# Altium PCB NEP.PCBDOC
Units mil, origin at the board's own origin, x right, y up, seen from the top; angles counter-clockwise.
Board outline 4000 x 3000 mil, 4 copper layers (Top Layer, Internal Plane 1, Internal Plane 2, Bottom Layer); 70 components, 126 nets, 630 pads, 225 vias.
Unrouted connection lines stored in the file: 2.
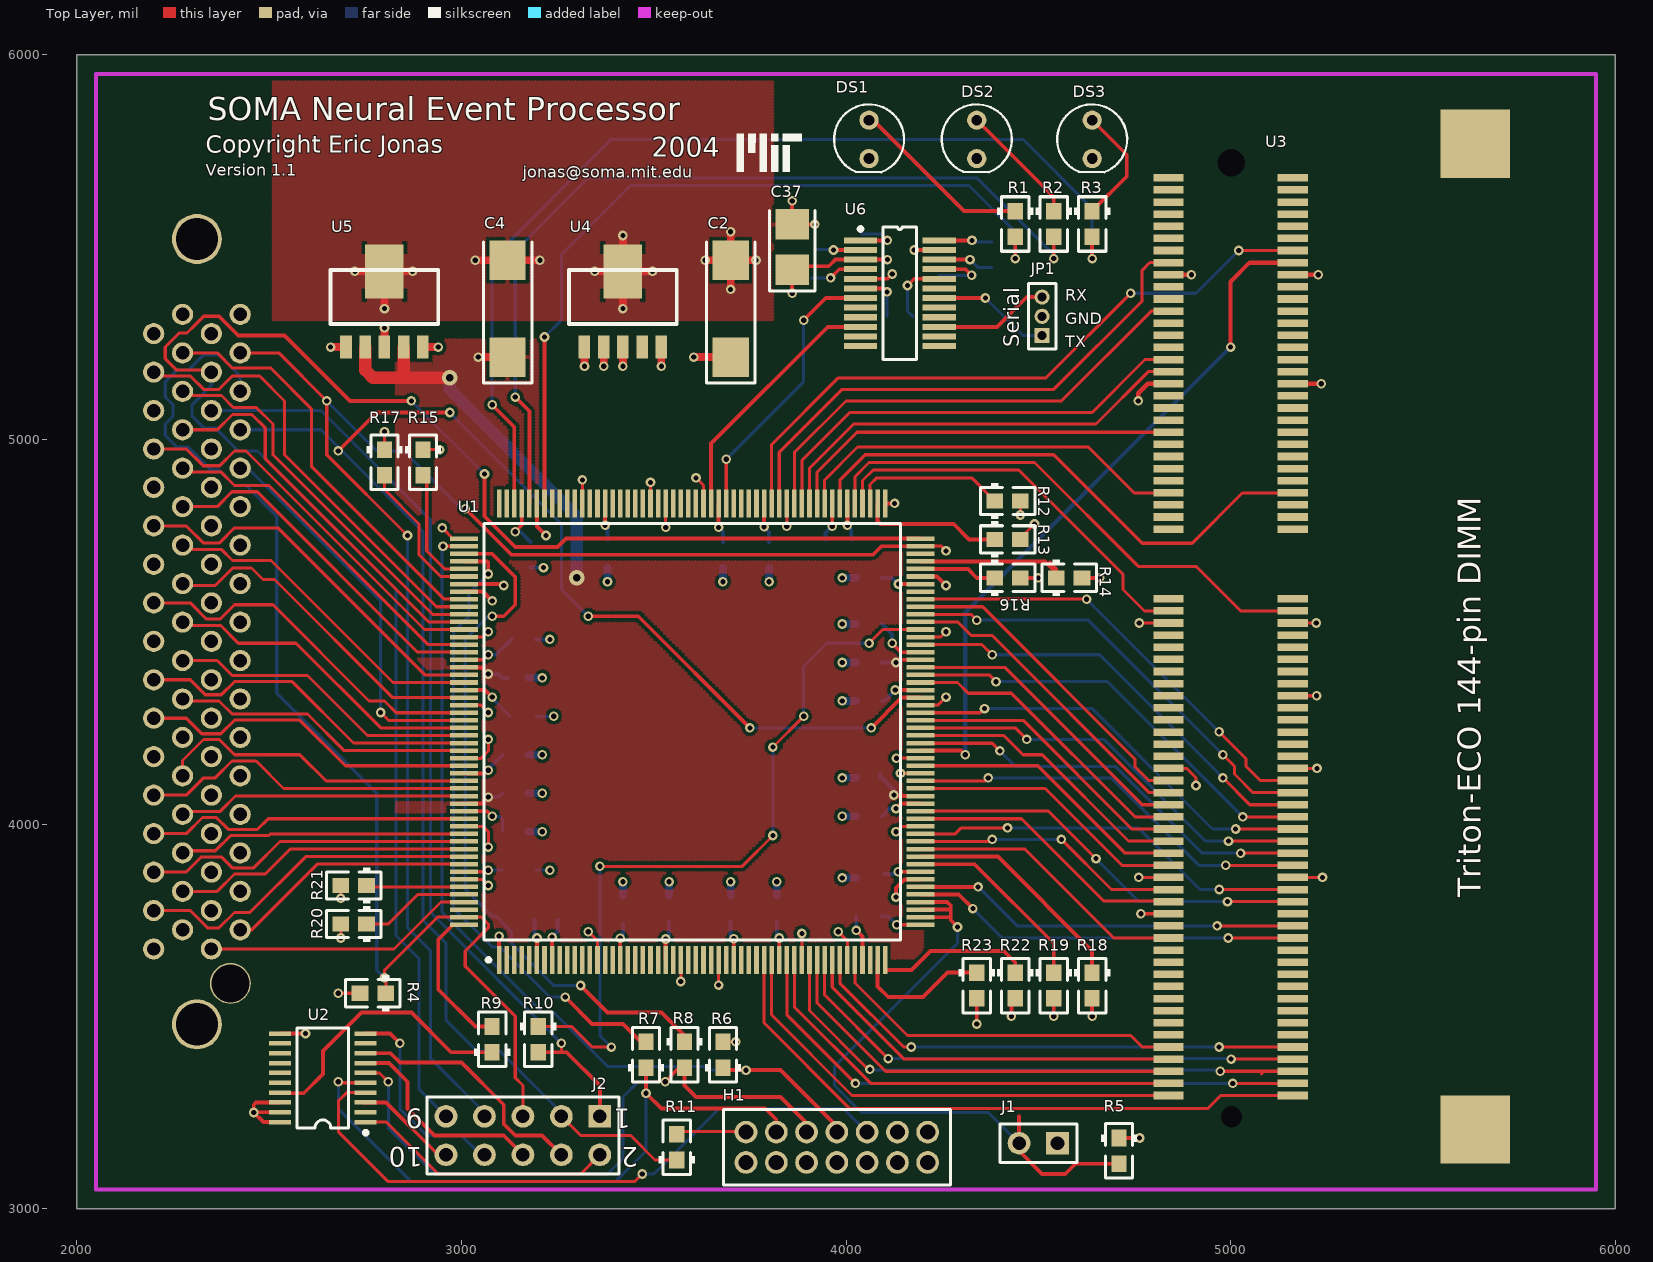
[diagram p0: Top Layer view]
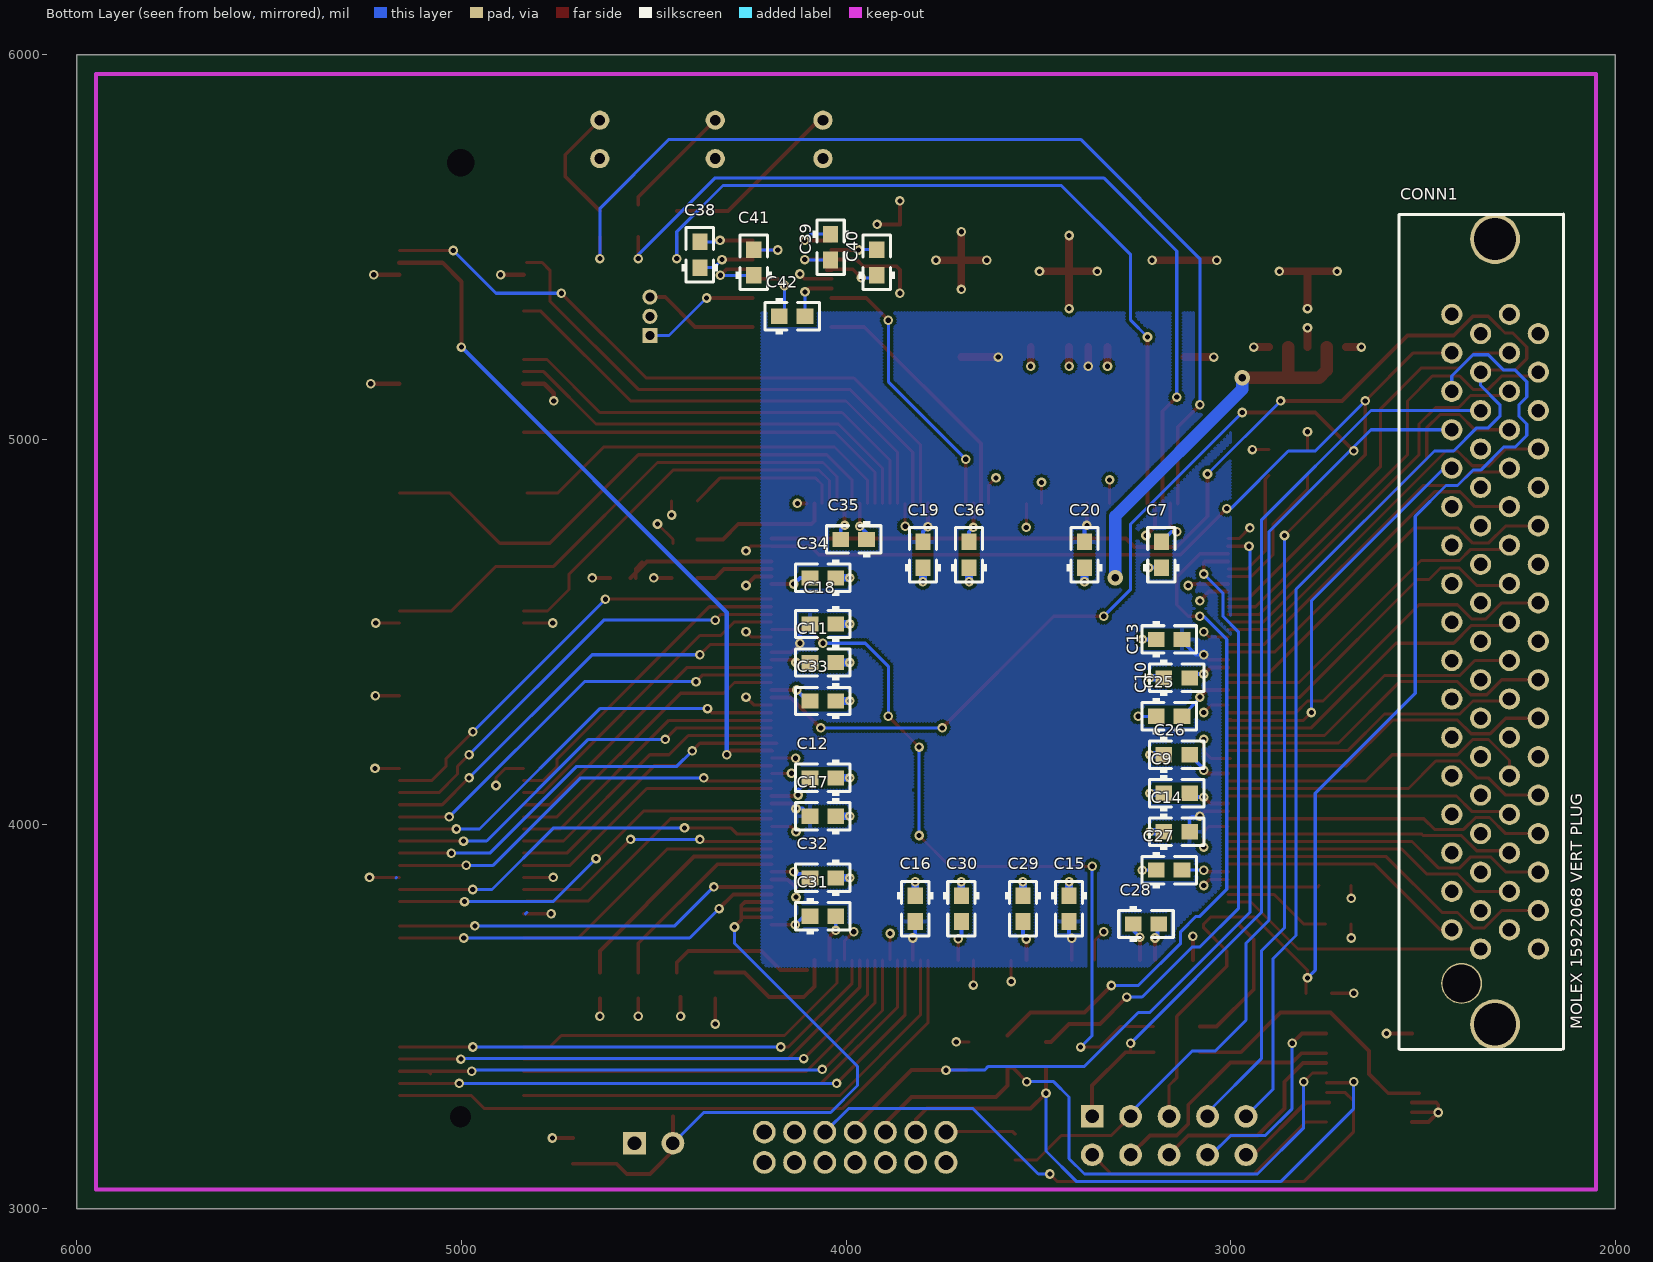
[diagram p1: Bottom Layer view, seen from below]
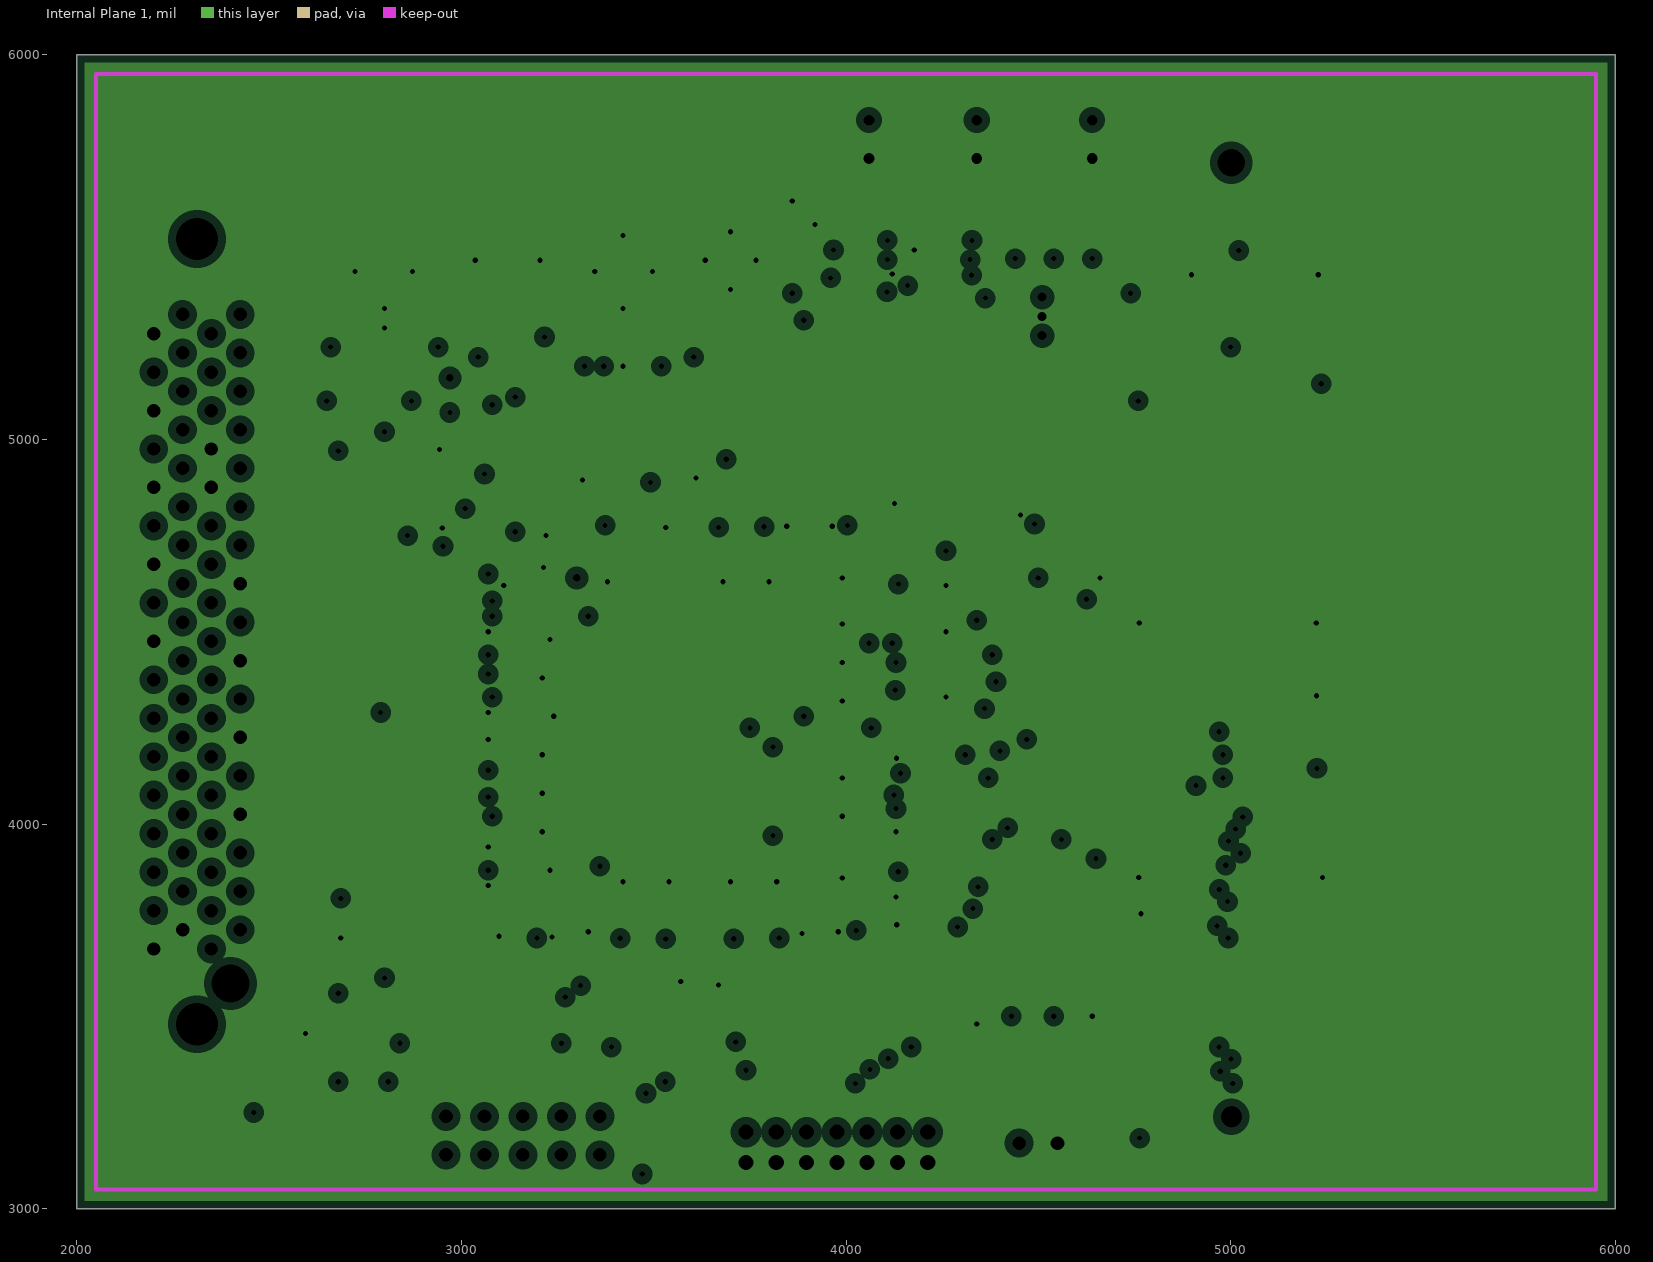
[diagram p2: Internal Plane 1, clearances drawn from the general rule]
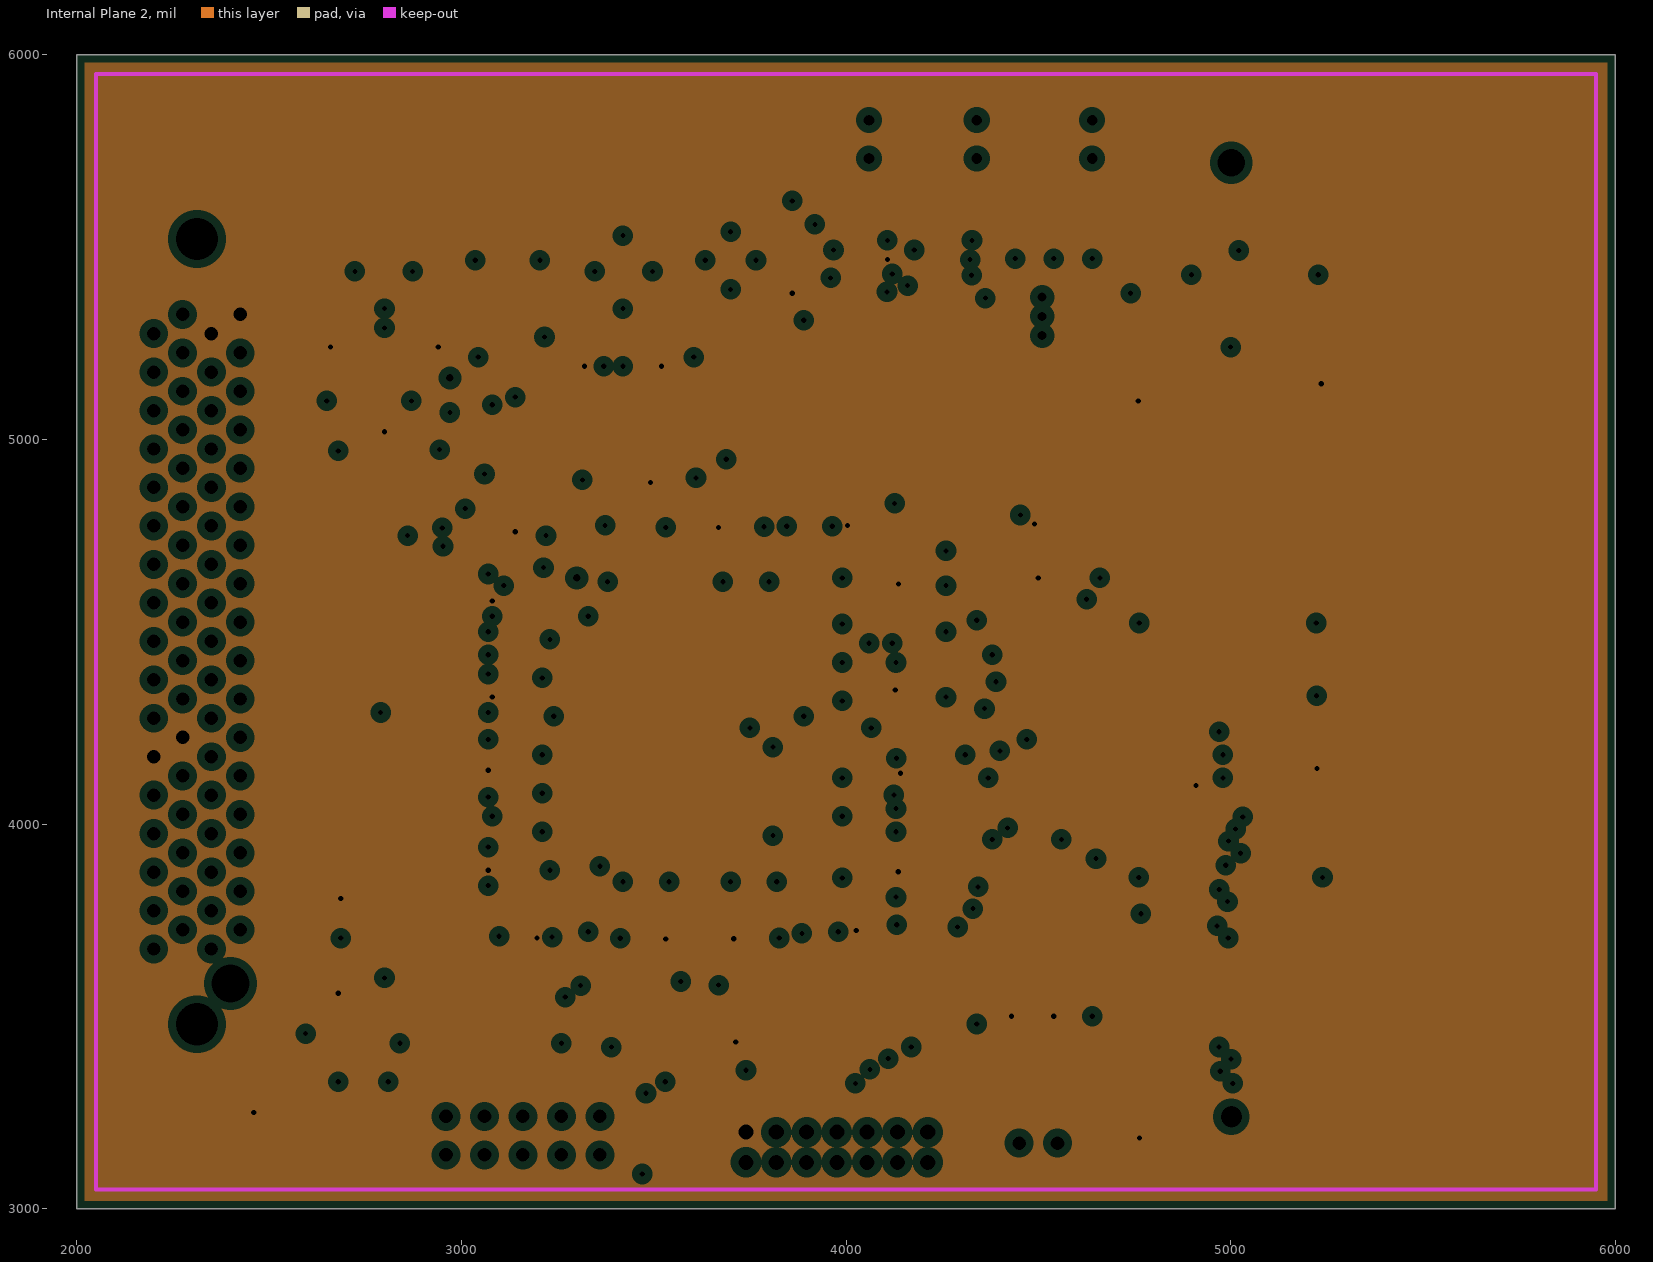
[diagram p3: Internal Plane 2, clearances drawn from the general rule]

## Layer stack, top to bottom
Top Layer: signal copper 1.4
Dielectric: core 12.6, FR-4, Dk 4.8
Internal Plane 1: plane copper 1.4, net GND
Dielectric: prepreg 12.6, FR-4, Dk 4.8
Internal Plane 2: plane copper 1.4, net VCC
Dielectric: core 12.6, FR-4, Dk 4.8
Bottom Layer: signal copper 1.4

## Board outline
2000,3000 6000,3000 6000,6000 2000,6000

## Design rules (kind name [scope] priority, off if disabled: settings)
Clearance [All] p1: gap=7
ComponentClearance [All] p1: gap=10 collisioncheckmode=0
HoleSize [All] p1: absolutevalues=TRUE maxlimit=200 minlimit=1 maxpercent=80.000 minpercent=20.000
PlaneClearance [All] p1: clearance=20
PlaneConnect [All] p1: planeconnectstyle=Relief reliefexpansion=20 reliefentries=4 reliefconductorwidth=10 reliefairgap=10
PolygonConnect "top heatsink" [(HasFootprint('SOT223-5/Simple'))] p1: connectstyle=Relief reliefconductorwidth=90 reliefentries=4 polygonreliefangle="90 Angle"
PolygonConnect [All] p2: connectstyle=Relief reliefconductorwidth=10 reliefentries=4 polygonreliefangle="90 Angle"
RoomDefinition FPGA [InComponentClass('FPGA')] p1: confinementstyle=ConfineIn formatcopy=TRUE outline 6000,3120 2540,3120 2540,5440 6000,5440
RoomDefinition TritonA [InComponentClass('TritonA')] p2: confinementstyle=ConfineIn formatcopy=TRUE outline 6000,5380 6900,5380 6900,6280 6000,6280
RoomDefinition powerclocks [InComponentClass('powerclocks')] p3: confinementstyle=ConfineIn formatcopy=TRUE outline 6000,6040 7100,6040 7100,5270 6000,5270
RoomDefinition serial [InComponentClass('serial')] p4: confinementstyle=ConfineIn formatcopy=TRUE outline 6000,6120 7000,6120 7000,4610 6000,4610
RoutingLayers [All] p1: top layer=Horizontal bottom layer=Vertical
RoutingVias [All] p1: holewidth=13.5 width=25 viastyle="Through Hole" minholewidth=13.5 minwidth=25 maxholewidth=28 maxwidth=50
SolderMaskExpansion [All] p1: expansion=4
TestPointUsage [All] p1: valid=0 allowmultiple=FALSE
Testpoint [All] p1: side=15 testpointundercomponent=TRUE minsize=40 maxsize=100 preferedsize=60 minholesize=0 maxholesize=40 preferedholesize=32 testpointgrid=1 style=1023 order=-539222988
Width [All] p1: maxlimit=200 minlimit=7 preferedwidth=8 minimp=50.000000 maximp=50.000000 favimp=50.000000
13 further rules are at their usual default settings.

## Classes and differential pairs
component class FPGA: CONN1 DS1 DS2 DS3 H1 J1 J2 R1 R2 R3 R4 R5 R6 R7 R8 R9 R10 R11 R12 R13 R14 R15 R16 R17 R18 R19 R20 R21 R22 R23 U1 U2
component class TritonA: U3
component class powerclocks: C1 C2 C3 C4 C5 C6 C7 C8 C9 C10 C11 C12 C13 C14 C15 C16 C17 C18 C19 C20 C21 C22 C23 C24 C25 C26 C27 C28 C29 C30 C31 C32 C33 C34 C35 C36 U4 U5
component class serial: C37 C38 C39 C40 C41 C42 J3 JP1 U6
net class ADDR[0..9]: ADDR0 ADDR1 ADDR2 ADDR3 ADDR4 ADDR5 ADDR6 ADDR7 ADDR8 ADDR9
net class GPIO[0..3]: GPIO0 GPIO1 GPIO2 GPIO3
net class MD[0..15]: MD0 MD1 MD2 MD3 MD4 MD5 MD6 MD7 MD8 MD9 MD10 MD11 MD12 MD13 MD14 MD15

## Components (designator, comment, footprint, x,y, rotation, side; value= is the part's Value field where it differs from the comment)
C2 "Cap Pol1" TC7343-2917 3700,5340 r90 top
C4 "Cap Pol1" TC7343-2917 3120,5340 r90 top
C7 "Cap" CC1608-0603 3180,4700 r90 bottom
C9 "Cap" CC1608-0603 3140,4080 r180 bottom
C10 "Cap" CC1608-0603 3140,4380 r180 bottom
C11 "Cap" CC1608-0603 4060,4420 r0 bottom
C12 "Cap" CC1608-0603 4060,4120 r0 bottom
C13 "Cap" CC1608-0603 3160,4480 r180 bottom
C14 "Cap" CC1608-0603 3140,3980 r180 bottom
C15 "Cap" CC1608-0603 3420,3780 r270 bottom
C16 "Cap" CC1608-0603 3820,3780 r270 bottom
C17 "Cap" CC1608-0603 4060,4020 r0 bottom
C18 "Cap" CC1608-0603 4060,4520 r0 bottom
C19 "Cap" CC1608-0603 3800,4700 r90 bottom
C20 "Cap" CC1608-0603 3380,4700 r90 bottom
C25 "Cap" CC1608-0603 3160,4280 r180 bottom
C26 "Cap" CC1608-0603 3140,4180 r180 bottom
C27 "Cap" CC1608-0603 3160,3880 r180 bottom
C28 "Cap" CC1608-0603 3220,3740 r180 bottom
C29 "Cap" CC1608-0603 3540,3780 r270 bottom
C30 "Cap" CC1608-0603 3700,3780 r270 bottom
C31 "Cap" CC1608-0603 4060,3760 r180 bottom
C32 "Cap" CC1608-0603 4060,3860 r0 bottom
C33 "Cap" CC1608-0603 4060,4320 r0 bottom
C34 "Cap" CC1608-0603 4060,4640 r0 bottom
C35 "Cap" CC1608-0603 3980,4740 r0 bottom
C36 "Cap" CC1608-0603 3680,4700 r90 bottom
C37 "Cap Pol1" TC3528-1411 3860,5500 r90 top
C38 "Cap" CC1608-0603 4380,5480 r90 bottom
C39 "Cap" CC1608-0603 4040,5500 r270 bottom
C40 "Cap" CC1608-0603 3920,5460 r90 bottom
C41 "Cap" CC1608-0603 4240,5460 r90 bottom
C42 "Cap" CC1608-0603 4140,5320 r180 bottom
CONN1 "CON68" "MOLEX 15922068" 2200,3675 r270 bottom locked
DS1 "LED0" T-1_LED 4060,5780 r270 top
DS2 "LED0" T-1_LED 4340,5780 r270 top
DS3 "LED0" T-1_LED 4640,5780 r270 top
H1 "Header 7X2" HDR2x7-2mm 3740,3120 r270 top
J1 "Header 2" HDR1X2 4550,3170 r180 top
J2 "Header 5X2" HDR2X5 3360,3240 r180 top
JP1 "MHDR1X3" MHDR1X3 4510,5270 r90 top
R1 "Res1" CC1608-0603 4440,5560 r270 top
R2 "Res1" CC1608-0603 4540,5560 r270 top
R3 "Res1" CC1608-0603 4640,5560 r270 top
R4 "Res1" CC1608-0603 2770,3560 r180 top
R5 "Res1" CC1608-0603 4710,3150 r270 top
R6 "Res1" CC1608-0603 3680,3400 r90 top
R7 "Res1" CC1608-0603 3480,3400 r90 top
R8 "Res1" CC1608-0603 3580,3400 r270 top
R9 "Res1" CC1608-0603 3080,3440 r90 top
R10 "Res1" CC1608-0603 3200,3440 r270 top
R11 "Res1" CC1608-0603 3560,3160 r90 top
R12 "DCI" CC1608-0603 4420,4840 r0 top
R13 "DCI" CC1608-0603 4420,4740 r0 top
R14 "DCI" CC1608-0603 4580,4640 r0 top
R15 "DCI" CC1608-0603 2900,4940 r270 top
R16 "DCI" CC1608-0603 4420,4640 r0 top
R17 "DCI" CC1608-0603 2800,4940 r270 top
R18 "DCI" CC1608-0603 4640,3580 r270 top
R19 "DCI" CC1608-0603 4540,3580 r270 top
R20 "DCI" CC1608-0603 2720,3740 r180 top
R21 "DCI" CC1608-0603 2720,3840 r180 top
R22 "DCI" CC1608-0603 4440,3580 r270 top
R23 "DCI" CC1608-0603 4340,3580 r270 top
U1 "XC3S-PQ208" F-QFP28X28-G208/Z32N 3600,4240 r90 top locked
U2 "XCF01S" TSSO6x6-G20/X.3 2640,3340 r90 top
U3 "TRITON-ECO" "144-PIN SMT SODIMM" 5000,5680 r270 top locked
U4 "TPS73625DCQR" SOT223-5/Simple 3420,5240 r0 top
U5 "TPS73601DCQR" SOT223-5/Simple 2800,5240 r0 top
U6 "AD Serial Port RTX" SSO-G24 4140,5380 r270 top

## Footprints (in the part's own frame and the unit in brackets; to place one, negate y for a bottom-side part, rotate by r counter-clockwise, add the part's x,y. Pads: shape width x height; smd on the part's side, far side on the other; paste and mask are expansions set on the pad)
"144-PIN SMT SODIMM" [mm] "144-PIN SODIMM  socket, MOLEX 54142-1440"
  rect 4.5x4.6 smd: 0(-2.25,16.15) 0(62.85,16.15)
  round 1.7 hole 1.8: 0(-1,0.05)
  round 1.2 hole 1.4: 0(62,0.05)
  rect 0.5x2 smd: 1(0,-4.1) 2(0,4.1) 3(0.8,-4.1) 4(0.8,4.1) 5(1.6,-4.1) 6(1.6,4.1) 7(2.4,-4.1) 8(2.4,4.1) 9(3.2,-4.1) 10(3.2,4.1) 11(4,-4.1) 12(4,4.1) 13(4.8,-4.1) 14(4.8,4.1) 15(5.6,-4.1) 16(5.6,4.1) 17(6.4,-4.1) 18(6.4,4.1) 19(7.2,-4.1) 20(7.2,4.1) 21(8,-4.1) 22(8,4.1) 23(8.8,-4.1) 24(8.8,4.1) 25(9.6,-4.1) 26(9.6,4.1) 27(10.4,-4.1) 28(10.4,4.1) 29(11.2,-4.1) 30(11.2,4.1) 31(12,-4.1) 32(12,4.1) 33(12.8,-4.1) 34(12.8,4.1) 35(13.6,-4.1) 36(13.6,4.1) 37(14.4,-4.1) 38(14.4,4.1) 39(15.2,-4.1) 40(15.2,4.1) 41(16,-4.1) 42(16,4.1) 43(16.8,-4.1) 44(16.8,4.1) 45(17.6,-4.1) 46(17.6,4.1) 47(18.4,-4.1) 48(18.4,4.1) 49(19.2,-4.1) 50(19.2,4.1) 51(20,-4.1) 52(20,4.1) 53(20.8,-4.1) 54(20.8,4.1) 55(21.6,-4.1) 56(21.6,4.1) 57(22.4,-4.1) 58(22.4,4.1) 59(23.2,-4.1) 60(23.2,4.1) 61(27.8,-4.1) 62(27.8,4.1) 63(28.6,-4.1) 64(28.6,4.1) 65(29.4,-4.1) 66(29.4,4.1) 67(30.2,-4.1) 68(30.2,4.1) 69(31,-4.1) 70(31,4.1) 71(31.8,-4.1) 72(31.8,4.1) 73(32.6,-4.1) 74(32.6,4.1) 75(33.4,-4.1) 76(33.4,4.1) 77(34.2,-4.1) 78(34.2,4.1) 79(35,-4.1) 80(35,4.1) 81(35.8,-4.1) 82(35.8,4.1) 83(36.6,-4.1) 84(36.6,4.1) 85(37.4,-4.1) 86(37.4,4.1) 87(38.2,-4.1) 88(38.2,4.1) 89(39,-4.1) 90(39,4.1) 91(39.8,-4.1) 92(39.8,4.1) 93(40.6,-4.1) 94(40.6,4.1) 95(41.4,-4.1) 96(41.4,4.1) 97(42.2,-4.1) 98(42.2,4.1) 99(43,-4.1) 100(43,4.1) 101(43.8,-4.1) 102(43.8,4.1) 103(44.6,-4.1) 104(44.6,4.1) 105(45.4,-4.1) 106(45.4,4.1) 107(46.2,-4.1) 108(46.2,4.1) 109(47,-4.1) 110(47,4.1) 111(47.8,-4.1) 112(47.8,4.1) 113(48.6,-4.1) 114(48.6,4.1) 115(49.4,-4.1) 116(49.4,4.1) 117(50.2,-4.1) 118(50.2,4.1) 119(51,-4.1) 120(51,4.1) 121(51.8,-4.1) 122(51.8,4.1) 123(52.6,-4.1) 124(52.6,4.1) 125(53.4,-4.1) 126(53.4,4.1) 127(54.2,-4.1) 128(54.2,4.1) 129(55,-4.1) 130(55,4.1) 131(55.8,-4.1) 132(55.8,4.1) 133(56.6,-4.1) 134(56.6,4.1) 135(57.4,-4.1) 136(57.4,4.1) 137(58.2,-4.1) 138(58.2,4.1) 139(59,-4.1) 140(59,4.1) 141(59.8,-4.1) 142(59.8,4.1) 143(60.6,-4.1) 144(60.6,4.1)
CC1608-0603 [mm]
  rect 1.1x1 smd: 1(-0.85,0) 2(0.85,0)
  silkscreen extent -1.8,-1.2 1.8,1.2
F-QFP28X28-G208/Z32N [mm]
  rect 1.85x0.3 smd: 1(-15.075,12.75) 2(-15.075,12.25) 3(-15.075,11.75) 4(-15.075,11.25) 5(-15.075,10.75) 6(-15.075,10.25) 7(-15.075,9.75) 8(-15.075,9.25) 9(-15.075,8.75) 10(-15.075,8.25) 11(-15.075,7.75) 12(-15.075,7.25) 13(-15.075,6.75) 14(-15.075,6.25) 15(-15.075,5.75) 16(-15.075,5.25) 17(-15.075,4.75) 18(-15.075,4.25) 19(-15.075,3.75) 20(-15.075,3.25) 21(-15.075,2.75) 22(-15.075,2.25) 23(-15.075,1.75) 24(-15.075,1.25) 25(-15.075,0.75) 26(-15.075,0.25) 27(-15.075,-0.25) 28(-15.075,-0.75) 29(-15.075,-1.25) 30(-15.075,-1.75) 31(-15.075,-2.25) 32(-15.075,-2.75) 33(-15.075,-3.25) 34(-15.075,-3.75) 35(-15.075,-4.25) 36(-15.075,-4.75) 37(-15.075,-5.25) 38(-15.075,-5.75) 39(-15.075,-6.25) 40(-15.075,-6.75) 41(-15.075,-7.25) 42(-15.075,-7.75) 43(-15.075,-8.25) 44(-15.075,-8.75) 45(-15.075,-9.25) 46(-15.075,-9.75) 47(-15.075,-10.25) 48(-15.075,-10.75) 49(-15.075,-11.25) 50(-15.075,-11.75) 51(-15.075,-12.25) 52(-15.075,-12.75) 105(15.075,-12.75) 106(15.075,-12.25) 107(15.075,-11.75) 108(15.075,-11.25) 109(15.075,-10.75) 110(15.075,-10.25) 111(15.075,-9.75) 112(15.075,-9.25) 113(15.075,-8.75) 114(15.075,-8.25) 115(15.075,-7.75) 116(15.075,-7.25) 117(15.075,-6.75) 118(15.075,-6.25) 119(15.075,-5.75) 120(15.075,-5.25) 121(15.075,-4.75) 122(15.075,-4.25) 123(15.075,-3.75) 124(15.075,-3.25) 125(15.075,-2.75) 126(15.075,-2.25) 127(15.075,-1.75) 128(15.075,-1.25) 129(15.075,-0.75) 130(15.075,-0.25) 131(15.075,0.25) 132(15.075,0.75) 133(15.075,1.25) 134(15.075,1.75) 135(15.075,2.25) 136(15.075,2.75) 137(15.075,3.25) 138(15.075,3.75) 139(15.075,4.25) 140(15.075,4.75) 141(15.075,5.25) 142(15.075,5.75) 143(15.075,6.25) 144(15.075,6.75) 145(15.075,7.25) 146(15.075,7.75) 147(15.075,8.25) 148(15.075,8.75) 149(15.075,9.25) 150(15.075,9.75) 151(15.075,10.25) 152(15.075,10.75) 153(15.075,11.25) 154(15.075,11.75) 155(15.075,12.25) 156(15.075,12.75)
  rect 0.3x1.85 smd: 53(-12.75,-15.075) 54(-12.25,-15.075) 55(-11.75,-15.075) 56(-11.25,-15.075) 57(-10.75,-15.075) 58(-10.25,-15.075) 59(-9.75,-15.075) 60(-9.25,-15.075) 61(-8.75,-15.075) 62(-8.25,-15.075) 63(-7.75,-15.075) 64(-7.25,-15.075) 65(-6.75,-15.075) 66(-6.25,-15.075) 67(-5.75,-15.075) 68(-5.25,-15.075) 69(-4.75,-15.075) 70(-4.25,-15.075) 71(-3.75,-15.075) 72(-3.25,-15.075) 73(-2.75,-15.075) 74(-2.25,-15.075) 75(-1.75,-15.075) 76(-1.25,-15.075) 77(-0.75,-15.075) 78(-0.25,-15.075) 79(0.25,-15.075) 80(0.75,-15.075) 81(1.25,-15.075) 82(1.75,-15.075) 83(2.25,-15.075) 84(2.75,-15.075) 85(3.25,-15.075) 86(3.75,-15.075) 87(4.25,-15.075) 88(4.75,-15.075) 89(5.25,-15.075) 90(5.75,-15.075) 91(6.25,-15.075) 92(6.75,-15.075) 93(7.25,-15.075) 94(7.75,-15.075) 95(8.25,-15.075) 96(8.75,-15.075) 97(9.25,-15.075) 98(9.75,-15.075) 99(10.25,-15.075) 100(10.75,-15.075) 101(11.25,-15.075) 102(11.75,-15.075) 103(12.25,-15.075) 104(12.75,-15.075) 157(12.75,15.075) 158(12.25,15.075) 159(11.75,15.075) 160(11.25,15.075) 161(10.75,15.075) 162(10.25,15.075) 163(9.75,15.075) 164(9.25,15.075) 165(8.75,15.075) 166(8.25,15.075) 167(7.75,15.075) 168(7.25,15.075) 169(6.75,15.075) 170(6.25,15.075) 171(5.75,15.075) 172(5.25,15.075) 173(4.75,15.075) 174(4.25,15.075) 175(3.75,15.075) 176(3.25,15.075) 177(2.75,15.075) 178(2.25,15.075) 179(1.75,15.075) 180(1.25,15.075) 181(0.75,15.075) 182(0.25,15.075) 183(-0.25,15.075) 184(-0.75,15.075) 185(-1.25,15.075) 186(-1.75,15.075) 187(-2.25,15.075) 188(-2.75,15.075) 189(-3.25,15.075) 190(-3.75,15.075) 191(-4.25,15.075) 192(-4.75,15.075) 193(-5.25,15.075) 194(-5.75,15.075) 195(-6.25,15.075) 196(-6.75,15.075) 197(-7.25,15.075) 198(-7.75,15.075) 199(-8.25,15.075) 200(-8.75,15.075) 201(-9.25,15.075) 202(-9.75,15.075) 203(-10.25,15.075) 204(-10.75,15.075) 205(-11.25,15.075) 206(-11.75,15.075) 207(-12.25,15.075) 208(-12.75,15.075)
  silkscreen extent -15.2,-13.75 13.75,13.75
HDR1X2 [mm]
  rect 1.5x1.5 hole 0.9: 1(0,0)
  round 1.5 hole 0.9: 2(2.54,0)
  silkscreen extent -1.27,-1.27 3.81,1.27
HDR2X5 [mm]
  rect 1.5x1.5 hole 0.9: 1(0,0)
  round 1.5 hole 0.9: 2(0,2.54) 3(2.54,0) 4(2.54,2.54) 5(5.08,0) 6(5.08,2.54) 7(7.62,0) 8(7.62,2.54) 9(10.16,0) 10(10.16,2.54)
  silkscreen extent -1.27,-1.27 11.43,3.81
HDR2x7-2mm [mm]
  round 1.5 hole 1: 1(0,0) 2(-2,0) 3(0,2) 4(-2,2) 5(0,4) 6(-2,4) 7(0,6) 8(-2,6) 9(0,8) 10(-2,8) 11(0,10) 12(-2,10) 13(0,12) 14(-2,12)
  silkscreen extent -3.5,-1.5 1.5,13.5
MHDR1X3 [mm]
  rect 1x1 hole 0.6: 1(0,0)
  round 1 hole 0.6: 2(1.27,0) 3(2.54,0)
  silkscreen extent -0.9,-0.9 3.44,0.9
"MOLEX 15922068" [mil]
  round 130 hole 110: 0(-1846,-112.5) 0(196,-112.5)
  round 106.3 hole 98.43: 0(89.37,-199.41)
  round 55 hole 35: 1(0,0) 2(-50,-75) 3(-100,0) 4(-150,-75) 5(-200,0) 6(-250,-75) 7(-300,0) 8(-350,-75) 9(-400,0) 10(-450,-75) 11(-500,0) 12(-550,-75) 13(-600,0) 14(-650,-75) 15(-700,0) 16(-750,-75) 17(-800,0) 18(-850,-75) 19(-900,0) 20(-950,-75) 21(-1000,0) 22(-1050,-75) 23(-1100,0) 24(-1150,-75) 25(-1200,0) 26(-1250,-75) 27(-1300,0) 28(-1350,-75) 29(-1400,0) 30(-1450,-75) 31(-1500,0) 32(-1550,-75) 33(-1600,0) 34(-1650,-75) 35(0,-150) 36(-50,-225) 37(-100,-150) 38(-150,-225) 39(-200,-150) 40(-250,-225) 41(-300,-150) 42(-350,-225) 43(-400,-150) 44(-450,-225) 45(-500,-150) 46(-550,-225) 47(-600,-150) 48(-650,-225) 49(-700,-150) 50(-750,-225) 51(-800,-150) 52(-850,-225) 53(-900,-150) 54(-950,-225) 55(-1000,-150) 56(-1050,-225) 57(-1100,-150) 58(-1150,-225) 59(-1200,-150) 60(-1250,-225) 61(-1300,-150) 62(-1350,-225) 63(-1400,-150) 64(-1450,-225) 65(-1500,-150) 66(-1550,-225) 67(-1600,-150) 68(-1650,-225)
  silkscreen extent -1911,-362 261,65
SOT223-5/Simple [mil] "SOT-223 without large heatsink"
  rect 30x60 smd: 1(-100,0) 2(-50,0) 3(0,0) 4(50,0) 5(100,0)
  rect 100x140 smd: 3(0,196.85)
  silkscreen extent -140,60 140,200
SSO-G24 [mm]
  rect 0.4x2.2 smd: 1(-3.492,-2.6) 2(-2.857,-2.6) 3(-2.222,-2.6) 4(-1.587,-2.6) 5(-0.952,-2.6) 6(-0.317,-2.6) 7(0.318,-2.6) 8(0.953,-2.6) 9(1.588,-2.6) 10(2.223,-2.6) 11(2.858,-2.6) 12(3.493,-2.6) 13(3.492,2.6) 14(2.857,2.6) 15(2.222,2.6) 16(1.587,2.6) 17(0.952,2.6) 18(0.317,2.6) 19(-0.318,2.6) 20(-0.953,2.6) 21(-1.588,2.6) 22(-2.223,2.6) 23(-2.858,2.6) 24(-3.493,2.6)
  silkscreen extent -4.38,-2.72 4.38,1.1
T-1_LED [mil]
  round 50 hole 28: 1(-50,0) 2(50,0)
  silkscreen extent -91,-91 85,91
TC3528-1411 [mm]
  rect 2x2.2 smd: 1(-1.5,0) 2(1.5,0)
  silkscreen extent -2.9,-1.5 2.4,1.5
TC7343-2917 [mm]
  rect 2.6x2.4 smd: 1(-3.2,0) 2(3.2,0)
  silkscreen extent -4.9,-1.6 4.4,1.6
TSSO6x6-G20/X.3 [mm]
  rect 0.3x1.45 smd: 1(-2.925,-2.825) 2(-2.275,-2.825) 3(-1.625,-2.825) 4(-0.975,-2.825) 5(-0.325,-2.825) 6(0.325,-2.825) 7(0.975,-2.825) 8(1.625,-2.825) 9(2.275,-2.825) 10(2.925,-2.825) 11(2.925,2.825) 12(2.275,2.825) 13(1.625,2.825) 14(0.975,2.825) 15(0.325,2.825) 16(-0.325,2.825) 17(-0.975,2.825) 18(-1.625,2.825) 19(-2.275,2.825) 20(-2.925,2.825)
  silkscreen extent -3.75,-2.95 3.3,1.7

## Part data
C2 C4 C37: "Polarized Capacitor (Radial)"
C7 C9 C10 C11 C12 C13 C14 C15 C16 C17 C18 C19 C20 C25 C26 C27 C28 C29 C30 C31 C32 C33 C34 C35 C36 C38 C39 C40 C41 C42: "Capacitor"
DS1 DS2 DS3: "Typical INFRARED GaAs LED"
H1: "Header, 7-Pin, Dual row"
J1: "Header, 2-Pin"
J2: "Header, 5-Pin, Dual row"
JP1: "Header, 3-Pin"
R1 R2 R3 R4 R5 R6 R7 R8 R9 R10 R11: "Resistor"
R12 R13 R14 R15 R16 R17 R18 R19 R20 R21 R22 R23: library part Res1, "Resistor"
U1: "Xilinx Spartan-3 PQ208"
U2: "Xilinx Platform Flash"
U3: library part TRITON_ECO, "Triton-ECO 400 MHz XScale DIMM"
U4 U5: library part TPS736XX, "Cap-free NMOS 400 mA LDO"
U6: library part ADM3312E, "AD Serial port transceivers"

## Via types
v1: diameter 25, hole 13.5, Top Layer to Bottom Layer, 223 vias
v2: diameter 40, hole 20, Top Layer to Bottom Layer, 2 vias

## Nets (pads, with @x,y where several pads share a name; then routed paths per layer and width w, separated by ;. In a path a pad name is that pad's centre, name@x,y a point inside that pad or via, vN(x,y) a via of type N, cw(c..) or ccw(c..) an arc to the next point about the centre after c; other vN are vias at no path point)
+1.2VCC: C4.1 C9.2 C10.2 C11.2 C12.2 U1.70 U1.88 U1.174 U1.192 U5.2 U5.4 | length 1582.4
  Top Layer w10: U1.192 3052.99,4052.99 v1(3070,4070) ; U1.174 3052.68,4407.32 v1(3070,4390) ; v1(4124.6,4075.4) 4127.32,4072.68 U1.70 ; v1(4130,4420) 4137.01,4427.01 U1.88
  Top Layer w20: v1(3044.02,5214.02) C4.1
  Top Layer w32: U5.2 2750,5180 2770,5160 v2(2970,5160) ; U5.4 2850,5166 2856,5160
  Bottom Layer w10: v1(3070,4070) 3096.54,4070 C9.2 ; v1(3070,4390) 3096.54,4390 C10.2 C10.2@3120,4380 ; C12.2@4090,4130 4090,4120 C12.2@4091.73,4118.27 ; C12.2 4124.6,4088.86 v1(4124.6,4075.4) ; C11.2 v1(4130,4420)
  Bottom Layer w32: v2(2970,5160) 2970,5130 3300,4800 v2(3300,4640)
+2.5VCC: C2.1 C13.2 C14.2 C15.2 C16.2 C17.2 C18.2 C19.2 C20.2 U1.17 U1.38 U1.69 U1.89 U1.121 U1.142 U1.173 U1.193 U4.2 | length 1101.7
  Top Layer w10: U1.193 3066.69,4033.31 v1(3080,4020) ; U1.173 3057.01,4427.01 v1(3070,4440) ; v1(3373.62,4776.38) U1.142 ; U1.17 v1(3412.99,3702.99) ; v1(3787.01,4772.99) U1.121 ; U1.38 v1(3826.38,3703.62) ; v1(4120,4470) 4143.31,4446.69 U1.89 ; v1(4130,4040) 4142.99,4052.99 U1.69
  Top Layer w20: v1(3370,5190) U4.2 ; v1(3604.02,5214.02) C2.1
  Bottom Layer w8: v1(3080,4020) 3100,4020 3106.54,4013.46 C14.2
  Bottom Layer w10: v1@3070,4450 v1(3070,4440) 3090,4440 C13.2@3130,4480 ; v1(3373.62,4776.38) 3380,4770 C20.2@3380,4740 ; v1(3412.99,3702.99) 3420,3710 C15.2@3420,3740 ; v1(3787.01,4772.99) 3800,4760 C19.2 ; C16.2 3820,3710 v1(3826.38,3703.62) ; C17.2 4113.46,4040 v1(4130,4040) ; C18.2 4120,4493.46 v1(4120,4470)
ADDR0: U1.36 U3.144 | length 1644.4
  Top Layer w8: U1.36 3787.01,3482.99 4010,3260 4940,3260 4974.17,3294.17 U3.144
ADDR1: U1.37 U3.143 | length 1261.7
  Top Layer w8: U1.37 3806.69,3503.31 4015.83,3294.17 U3.143
ADDR2: U1.39 U3.142 | length 1531.8
  Top Layer w8: U1.39 3846.06,3503.94 v1(4024.33,3325.67) ; v1(5005.67,3325.67) U3.142
  Bottom Layer w8: v1(4024.33,3325.67) v1(5005.67,3325.67)
ADDR3: U1.40 U3.141 | length 1177.3
  Top Layer w8: U1.40 3865.75,3524.25 4064.33,3325.67 U3.141
ADDR4: U1.42 U3.140 | length 1461.4
  Top Layer w8: U1.42 3905.12,3514.88 v1@4060,3360 ; v1(4972.83,3357.17) U3.140 ; 5080,3350 5087.17,3357.17
  Bottom Layer w8: v1@4062,3360 4970,3360 v1(4972.83,3357.17)
  other v1: 4062,3362
ADDR5: U1.43 U3.139 | length 1098.8
  Top Layer w8: U1.43 3924.8,3535.2 4102.83,3357.17 U3.139
ADDR6: U1.44 U3.138 | length 1377
  Top Layer w8: U1.44 3944.49,3555.51 v1(4110,3390) ; v1(5001.34,3388.66) U3.138
  Bottom Layer w8: v1(4110,3390) 5000,3390 v1(5001.34,3388.66)
ADDR7: U1.45 U3.137 | length 1022.6
  Top Layer w8: U1.45 3964.17,3575.83 4151.34,3388.66 U3.137
ADDR8: U1.46 U3.136 | length 1306.7
  Top Layer w8: U1.46 3983.86,3586.14 4149.84,3420.16 v1(4169.84,3420.16) ; v1(4970.16,3420.16) U3.136
  Bottom Layer w8: v1(4169.84,3420.16) v1(4970.16,3420.16)
ADDR9: U1.48 U3.135 | length 944.2
  Top Layer w8: U1.48 4023.23,3586.77 4160,3450 4740,3450 4770,3420 U3.135
CF: J2.6 U2.7 | length 548.5
  Top Layer w10: U2.7 2811.61,3378.39 2860,3330 2860,3260 2930,3190 3110,3190 J2.6
EADDR0: CONN1.10 U1.189 | length 838.7
  Top Layer w8: CONN1.10 2275,4165 2329.64,4219.64 2370.36,4219.64 2410,4180 2580,4180 2647.95,4112.05 U1.189
EADDR1: CONN1.9 U1.190 | length 872.7
  Top Layer w8: CONN1.9 2285,4075 2330,4120 2360,4120 2403.58,4163.58 2466.42,4163.58 2537.64,4092.36 U1.190
EADDR2: CONN1.8 U1.191 | length 739.9
  Top Layer w8: CONN1.8@2283,4033 2373,4033 2412.68,4072.68 U1.191
EADDR3: CONN1.7 U1.194 | length 848.2
  Top Layer w8: CONN1.7 2285,3975 2327,4017 2363,4017 2394,3986 2470,3986 2497.62,4013.62 U1.194
EADDR4: CONN1.6 U1.196 | length 744.2
  Top Layer w8: CONN1.6@2280.44,3930.44 2360.44,3930.44 2400,3970 2500,3970 2504.25,3974.25 U1.196
EADDR5: CONN1.5 U1.197 | length 863
  Top Layer w8: CONN1.5 2285,3875 2324.44,3914.44 2375.56,3914.44 2404,3886 2460,3886 2528.57,3954.57 U1.197
EADDR6: CONN1.4 U1.198 | length 777
  Top Layer w8: CONN1.4 2365,3825 2410,3870 2490,3870 2554.88,3934.88 U1.198
EADDR7: CONN1.3 U1.199 | length 901.8
  Top Layer w8: CONN1.3 2295,3775 2340,3730 2370,3730 2410,3770 2450,3770 2595.2,3915.2 U1.199
EDATA0: CONN1.32 U1.165 | length 1084.7
  Top Layer w8: CONN1.32 2365,5225 2404.85,5185.15 2504.85,5185.15 2610,5080 2610,4930 2955.51,4584.49 U1.165
EDATA1: CONN1.31 U1.166 | length 1170
  Top Layer w8: CONN1.31 2205,5175 2215.28,5164.72 2295.28,5164.72 2330,5130 2370,5130 2404.65,5164.65 2475.35,5164.65 2540,5100 2540,4960 2935.2,4564.8 U1.166
EDATA2: CONN1.30 U1.167 | length 1018.6
  Top Layer w8: CONN1.30 2286.11,5113.89 2376.11,5113.89 2407.06,5082.94 2467.06,5082.94 2510,5040 2510,4960 2924.88,4545.12 U1.167
EDATA3: CONN1.28 U1.168 | length 1018.2
  Top Layer w8: CONN1.28 2365,5025 2404.74,5064.74 2455.26,5064.74 2490,5030 2490,4950 2914.57,4525.43 U1.168
EDATA4: CONN1.27 U1.169 | length 1032.7
  Top Layer w8: CONN1.27 2285,4975 2328.48,4931.52 2371.52,4931.52 2410,4970 2440,4970 2904.25,4505.75 U1.169
EDATA5: CONN1.26 U1.171 | length 921.5
  Top Layer w8: CONN1.26 2284.48,4915.52 2374.48,4915.52 2410,4880 2500,4880 2913.62,4466.38 U1.171
EDATA6: CONN1.24 U1.172 | length 920.3
  Top Layer w8: CONN1.24 2365,4825 2403.75,4863.75 2468.87,4863.75 2885.93,4446.69 U1.172
EDATA7: CONN1.23 U1.175 | length 1000
  Top Layer w8: CONN1.23 2285,4775 2329.87,4730.13 2370.13,4730.13 2410,4770 2522.63,4770 2904.99,4387.64 U1.175
EDATA8: CONN1.22 U1.176 | length 879.4
  Top Layer w8: CONN1.22 2285.87,4714.13 2375.87,4714.13 2404.85,4685.15 2504.85,4685.15 2822.05,4367.95 U1.176
EDATA9: CONN1.20 U1.178 | length 894.9
  Top Layer w8: CONN1.20@2270,4620 2360,4620 2405.55,4665.55 2454.45,4665.55 2484.32,4635.69 2514.32,4635.69 2821.42,4328.58 U1.178
EDATA10: CONN1.19 U1.180 | length 956
  Top Layer w8: CONN1.19 2295,4575 2337.52,4532.48 2372.48,4532.48 2410,4570 2510,4570 2760,4320 2800,4320 2830.79,4289.21 U1.180
EDATA11: CONN1.18 U1.182 | length 845.5
  Top Layer w8: CONN1.18 2283.52,4516.48 2373.52,4516.48 2420,4470 2570,4470 2790.16,4249.84 U1.182
EDATA12: CONN1.16 U1.183 | length 812.2
  Top Layer w8: CONN1.16 2365,4425 2404,4386 2600,4386 2755.84,4230.16 U1.183
EDATA13: CONN1.15 U1.184 | length 902.8
  Top Layer w8: CONN1.15 2295,4375 2333.98,4336.02 2376.02,4336.02 2410,4370 2560,4370 2719.53,4210.47 U1.184
EDATA14: CONN1.14 U1.185 | length 787.1
  Top Layer w8: CONN1.14 2280,4320 2370,4320 2404,4286 2600,4286 2695.21,4190.79 U1.185
EDATA15: CONN1.13 U1.187 | length 887
  Top Layer w8: CONN1.13 2285,4275 2325.36,4234.64 2374.64,4234.64 2410,4270 2580,4270 2698.58,4151.42 U1.187
EVENT: CONN1.36 U1.200 | length 652.1
  Top Layer w8: CONN1.36 2455,3725 2625.51,3895.51 U1.200
EVENTCE: CONN1.35 U1.205 | length 707.1
  Top Layer w8: CONN1.35 2825,3675 2947.09,3797.09 U1.205
FCCLK: CONN1.65 J2.9 U1.104 | length 4759.2
  Top Layer w8: 2309.32,5299.32 2286.45,5276.45 2266.45,5276.45 2230,5240 2230,5210 2260,5180 2345,5180 CONN1.65
  Top Layer w10: 2309.32,5299.32 2330,5320 2370,5320 2420,5270 2540,5270 2710,5100 v1(2870,5100) ; v1(3060,4910) 3060,4800 3140,4720 3250,4720 3271.97,4741.97 U1.104
  Bottom Layer w8: CONN1.65 2350,5140 2300,5090 2300,5060 2330,5030 2360,5030 2420,4970 2470,4970 2830,4610 2830,3710 2890,3650 2890,3310 J2.9 ; v1(2870,5100) v1(3060,4910)
FDIN: CONN1.63 J2.1 R10.2 | length 2488.2
  Top Layer w8: 3260,3406.54 v1(3260,3430)
  Top Layer w10: R10.2 3273.46,3406.54 3360,3320 J2.1
  Bottom Layer w8: CONN1.63 2635,5075 2920,4790 2920,3770 v1(3260,3430)
FDONE: CONN1.66 J2.7 U1.103 | length 4086.6
  Top Layer w8: CONN1.66 2525,5225 v1(2650,5100) 2650,4960 v1(2860,4750) ; U1.103 4247.72,4722.28 v1(4260,4710)
  Top Layer w10: v1(3010,4820) 3130,4700 4070,4700 4092.28,4722.28 U1.103
  Bottom Layer w8: v1(2650,5100) 2780,4970 2850,4970 v1@3000,4820 ; v1(2860,4750) 2860,3730 2920,3670 2920,3390 3060,3250 J2.7
FINIT: CONN1.62 J2.3 R11.1 U1.83 | length 4662.7
  Top Layer w8: J2.3 3310,3190 3440,3190 3503.46,3126.54 R11.1
  Top Layer w10: v1(2680,4970) 2780,5070 v1(2970,5070) ; v1(3330,4540) 3460,4540 v1(3750,4250) ; v1(4065.89,4250) 4144.48,4328.58 U1.83
  Bottom Layer w8: CONN1.62 2635,5025 2900,4760 2900,3750 2960,3690 2960,3490 3040,3410 3100,3410 3260,3250 J2.3 ; v1(2970,5070) 3260,4780 3260,4610 v1(3330,4540) ; v1(3750,4250) v1(4065.89,4250)
FPROG: CONN1.64 J2.5 R4.1 U1.207 | length 3117.7
  Top Layer w8: v1(2800,3600) 2800,3620 2937.72,3757.72 3052.28,3757.72 3070,3740 3070,3730 3010,3670 3010,3630 3140,3500 3140,3340 3160,3320 J2.5 ; R4.1 v1@2803.46,3600
  Bottom Layer w8: CONN1.64 2425,5165 2370,5220 2330,5220 2290,5180 2260,5180 2230,5150 2230,5110 2250,5090 2250,5060 2230,5040 2230,5010 2260,4980 2290,4980 2350,4920 2370,4920 2410,4880 2440,4880 2520,4800 2520,4340 2780,4080 2780,3620 v1(2800,3600)
GND: C2.2 C4.2 C7.1 C9.1 C10.1 C11.1 C12.1 C13.1 C14.1 C15.1 C16.1 C17.1 C18.1 C19.1 C20.1 C25.1 C26.1 C27.1 C28.1 C29.1 C30.1 C31.1 C32.1 C33.1 C34.1 C35.1 C36.1 C37.2 C41.2 CONN1.1 CONN1.2 CONN1.17 CONN1.21 CONN1.25 CONN1.29 CONN1.33 CONN1.42 CONN1.46 CONN1.50 CONN1.54 CONN1.59 CONN1.61 DS1.2 DS2.2 DS3.2 H1.1 H1.3 H1.5 H1.7 H1.9 H1.11 H1.13 J1.1 JP1.2 R12.2 R14.2 R15.1 R18.2 R20.2 R23.2 U1.1 U1.8 U1.14 U1.25 U1.30 U1.41 U1.47 U1.53 U1.59 U1.66 U1.75 U1.82 U1.91 U1.99 U1.105 U1.112 U1.118 U1.129 U1.134 U1.145 U1.151 U1.157 U1.163 U1.170 U1.179 U1.186 U1.195 U1.202 U2.11 U3.17 U3.18 U3.65 U3.66 U3.78 U3.107 U3.108 U3.113 U4.3 U5.3 U6.5 U6.23 | length 5368
  Top Layer w8: v1(2686.54,3703.46) R20.2 ; R15.1 v1(2943.46,4973.46) ; v1(2950,4770) 2978.03,4741.97 U1.157 ; U1.186@3000,4170 3050,4170 3070,4190 v1(3070,4220) ; U1.202 3053.86,3856.14 v1(3070,3840) ; U1.195 3056.06,3993.94 3070,3980 v1(3070,3940) ; U1.179 3051.1,4308.9 v1(3070,4290) ; U1.170 3056.06,4486.06 v1(3070,4500) ; U1.145 v1(3314.57,4894.57) ; v1(3330,3720) 3353.94,3696.06 U1.14 ; v1(3531.1,4771.1) U1.134 ; v1(3570.47,3590.47) U1.25 ; v1(3610,4900) 3629.53,4880.47 U1.129 ; v1(3668.9,3581.1) U1.30 ; v1(3846.06,4773.94) U1.118 ; U1.41 v1(3885.43,3715.43) ; v1(3980,3720) 4003.54,3696.46 U1.47 ; v1(4130,3980) 4143.94,3993.94 U1.66 ; v1(4131.1,4171.1) U1.75 ; U1.82 4238.9,4308.9 v1(4260,4330) ; U1.91 4246.06,4486.06 v1(4260,4500) ; v1(4453.46,4803.46) R12.2 ; v1(4761.1,3861.1) U3.107 ; v1(4762.52,4522.52) U3.65 ; v1(4766.61,3766.61) U3.113 ; U3.108 v1(5238.9,3861.1) ; U3.78 v1(5223.54,4333.54) ; U3.66 v1(5222.52,4522.52)
  Top Layer w10: U2.11 v1(2594.84,3455.16) ; U1.163 3106.14,4623.86 v1(3110,4620) ; U1.1 v1(3098.03,3708.03) ; U1.151 3196.46,4773.54 v1(3220,4750) ; U1.8 v1(3235.83,3705.83) ; v1(3860,5620) C37.2 v1(3919.06,5559.06) ; v1(3964.17,4774.17) U1.112 ; U6.5 4107.5,5417.5 v1(4120,5430) ; U1.105 v1(4126.5,4833.5) ; v1(4130,3810) 4130,3834.11 4152.04,3856.14 U1.59 ; v1(4131.97,3738.03) U1.53 ; v1(4177.5,5492.5) U6.23 ; U1.99 4236.46,4643.54 v1(4260,4620) ; v1(4340,3480) R23.2 ; R14.2 v1(4660,4640) ; v1(4640,3500) R18.2
  Top Layer w12: U3.17 v1(4898.03,5428.03) ; U3.18 v1(5228.03,5428.03)
  Top Layer w20: v1(2723.15,5436.85) v1(2873.15,5436.85) ; U5.3@2800,5240 v1(2800,5290) ; v1(2800,5340) U5.3@2800,5436.85 ; v1(3035.98,5465.98) v1(3204.02,5465.98) ; v1(3346.85,5436.85) v1(3496.85,5436.85) ; v1(3420,5190) U4.3@3420,5240 ; v1(3420,5340) v1(3420,5530) ; v1(3634.02,5465.98) v1(3765.98,5465.98) ; v1(3700,5390) v1(3700,5540)
  Bottom Layer w8: C27.1 v1(3230,3880) ; C25.1 v1(3240,4280) ; v1(3885.43,3715.43) v1@3890,3720 ; v1(4177.5,5492.5) C41.2@4242.36,5492.5 ; v1@4760,3760 v1(4766.61,3766.61) ; v1@4760,4520 v1(4762.52,4522.52) ; 4830,3770 4833.39,3766.61 ; 5168.9,3861.1 5170,3860 ; v1(5228.03,5428.03) v1@5230,5430 ; v1(5238.9,3861.1) v1@5240,3860
  Bottom Layer w10: C7.1 v1(3213.46,4666.54) ; C13.1 v1@3220,4480 ; v1(3235.83,3705.83) 3250,3720 C28.1@3250,3750 ; v1@3530,4770 v1(3531.1,4771.1) ; C35.1 3946.54,4756.54 v1(3964.17,4774.17) ; C31.1 4110,3760 v1(4131.97,3738.03)
  Bottom Layer w20: C14.1 v1(3210,3980) ; C9.1 v1(3210,4080) ; C26.1 v1(3210,4180) ; C10.1 v1(3210,4380) ; v1(3380,4630) C20.1 ; C15.1 v1(3420,3850) ; C29.1 v1(3540,3850) ; v1(3680,4630) C36.1 ; C30.1 v1(3700,3850) ; v1(3800,4630) C19.1 ; C16.1 v1(3820,3850) ; v1(3990,3860) C32.1 ; v1(3990,4020) C17.1 ; v1(3990,4120) C12.1 ; v1(3990,4320) C33.1 ; v1(3990,4420) C11.1 ; v1(3990,4520) C18.1 ; v1(3990,4640) C34.1
  other v1: 3230,4480
GPIO0: U1.108 U3.63 | length 1041.3
  Top Layer w8: U1.108 4042.91,4892.91 4070,4920 4450,4920 4720.26,4649.74 4720.26,4609.74 4775.98,4554.02 U3.63
GPIO1: U1.109 U3.64 | length 1383
  Top Layer w8: U1.109 4023.23,4903.23 4060,4940 4490,4940 4760,4670 4910,4670 5025.98,4554.02 U3.64
GPIO2: U1.113 U3.53 | length 1030.1
  Top Layer w8: U1.113 3944.49,4894.49 4030,4980 4630,4980 4748.9,4861.1 U3.53@4828.9,4861.1
GPIO3: U1.111 U3.54 | length 1414.9
  Top Layer w8: U1.111 3983.86,4893.86 4050,4960 4540,4960 4770,4730 4900,4730 5031.1,4861.1 U3.54
LFDIN: R10.1 U1.92 | length 1994
  Top Layer w8: R10.1 3286.54,3473.46 3340,3420 v1(3390,3420) ; v1(3360,3890) 3730,3890 v1(3810,3970) ; v1(3810,4200) v1(3890,4280) ; v1(4060,4470) 4095.75,4505.75 U1.92
  Bottom Layer w8: v1(3360,3890) 3360,3450 v1(3390,3420) ; v1(3810,3970) v1(3810,4200) ; v1(3890,4280) 3890,4410 3950,4470 v1(4060,4470)
MD0: U1.71 U3.105 | length 727.8
  Top Layer w8: U1.71 4517.64,4092.36 4717.4,3892.6 U3.105
MD1: U1.72 U3.106 | length 1065.4
  Top Layer w8: U1.72 4362.05,4112.05 v1(4370,4120) ; v1(4987.4,3892.6) U3.106
  Bottom Layer w8: v1(4370,4120) 4690,4120 4917.4,3892.6 v1(4987.4,3892.6)
MD2: U1.74 U3.103 | length 739.2
  Top Layer w8: U1.74 4498.58,4151.42 4725.91,3924.09 U3.103
MD3: U1.77 U3.104 | length 1099.8
  Top Layer w8: U1.77@4180,4210 4380,4210 v1(4400,4190) ; v1(5025.91,3924.09) U3.104
  Bottom Layer w8: v1(4400,4190) 4440,4150 4700,4150 4925.91,3924.09 v1(5025.91,3924.09)
MD4: U1.78 U3.101 | length 758.6
  Top Layer w8: U1.78@4193.66,4230 4410,4230 4460,4180 4510,4180 4734.41,3955.59 U3.101
MD5: U1.79 U3.102 | length 1089.8
  Top Layer w8: U1.79 4440.16,4249.84 v1(4470,4220) ; v1(4994.41,3955.59) U3.102
  Bottom Layer w8: v1(4470,4220) 4670,4220 4934.41,3955.59 v1(4994.41,3955.59)
MD6: U1.80 U3.99 | length 762.1
  Top Layer w8: U1.80 4460.47,4269.53 4742.91,3987.09 U3.99
MD7: U1.81 U3.100 | length 1102
  Top Layer w8: U1.81 4349.21,4289.21 v1(4360,4300) ; v1(5012.91,3987.09) U3.100
  Bottom Layer w8: v1(4360,4300) 4640,4300 4952.91,3987.09 v1(5012.91,3987.09)
MD8: U1.85 U3.97 | length 789.8
  Top Layer w8: U1.85 4290,4367.95 4317.95,4340 4430,4340 4751.42,4018.58 U3.97
MD9: U1.86 U3.98 | length 1120.8
  Top Layer w8: U1.86 4372.36,4387.64 v1(4390,4370) ; v1(5031.42,4018.58) U3.98
  Bottom Layer w8: v1(4390,4370) 4680,4370 v1(5031.42,4018.58)
MD10: U1.87 U3.95 | length 793.1
  Top Layer w8: U1.87 4412.68,4407.32 4769.92,4050.08 U3.95
MD11: U1.90 U3.96 | length 1140.4
  Top Layer w8: U1.90 4353.62,4466.38 v1(4380,4440) ; v1(4980,4120) 5049.92,4050.08 U3.96
  Bottom Layer w8: v1(4380,4440) 4660,4440 v1(4980,4120)
MD12: U1.93 U3.93 | length 828.9
  Top Layer w8: U1.93 4290,4525.43 4325.43,4490 4380,4490 4788.43,4081.57 U3.93
MD13: U1.94 U3.94 | length 1171.6
  Top Layer w8: U1.94 4324.88,4545.12 v1(4340,4530) ; v1(4980,4180) 5010,4150 5010,4130 5058.43,4081.57 U3.94
  Bottom Layer w8: v1(4340,4530) 4630,4530 v1(4980,4180)
MD14: U1.95 U3.91 | length 843.9
  Top Layer w8: U1.95 4355.2,4564.8 4751.42,4168.58 4751.42,4148.58 4786.93,4113.07 U3.91
MD15: U1.96 U3.92 | length 1174.9
  Top Layer w8: U1.96 v1(4625.51,4584.49) ; v1(4970,4240) 5040,4170 5040,4150 5076.93,4113.07 U3.92
  Bottom Layer w8: v1(4625.51,4584.49) v1(4970,4240)
NetC38_1: C38.1 U6.22 | length 146.3
  Top Layer w10: U6.22 v1(4322.5,5467.5)
  Bottom Layer w8: v1(4322.5,5467.5) 4343.46,5446.54 C38.1
NetC38_2: C38.2 U6.24 | length 139.3
  Top Layer w10: U6.24 v1(4327.5,5517.5)
  Bottom Layer w8: v1(4327.5,5517.5) 4331.54,5513.46 C38.2
NetC39_1: C39.1 U6.1 | length 144
  Top Layer w10: U6.1 v1(4107.5,5517.5)
  Bottom Layer w8: C39.1 4091.54,5533.46 v1(4107.5,5517.5)
NetC40_1: C40.1 U6.4 | length 149.3
  Top Layer w10: v1(3960,5420) 3982.5,5442.5 U6.4 ; U6.4@4037.64,5440 U6.4@4050,5440
  Bottom Layer w8: C40.1@3910,5420 v1(3960,5420)
NetC40_2: C40.2 U6.2 | length 118
  Top Layer w10: v1(3967.5,5492.5) U6.2
  Bottom Layer w8: C40.2 3966.54,5493.46 v1(3967.5,5492.5)
NetC41_1: C41.1 U6.21 | length 177.3
  Top Layer w10: U6.21 4310.57,5442.5 v1(4326.54,5426.54)
  Bottom Layer w8: C41.1 v1(4326.54,5426.54)
NetC42_1: C42.1 U6.20 | length 175.2
  Top Layer w10: v1(4160,5400) 4177.5,5417.5 U6.20
  Bottom Layer w8: v1(4160,5400) 4160,5333.46 C42.1
NetC42_2: C42.2 U6.6 | length 136.1
  Top Layer w10: U6.6 4097.5,5392.5 v1(4106.54,5383.46)
  Bottom Layer w8: C42.2 v1(4106.54,5383.46)
NetDS1_1: DS1.1 R1.1 | length 478
  Top Layer w10: DS1.1 4070,5830 4306.54,5593.46 R1.1
NetDS2_1: DS2.1 R2.1 | length 302.8
  Top Layer w10: DS2.1 4540,5630 R2.1@4540,5610
NetDS3_1: DS3.1 R3.1 | length 325.2
  Top Layer w10: DS3.1@4630,5840 4730,5740 4730,5683.46 R3.1
NetJ1_2: J1.2 R5.2 U1.54 U1.55 U1.56 | length 1771
  Top Layer w10: U1.54 4272.28,3757.72 ; U1.55 4269.69,3777.4 4272.28,3780 ; U1.56 4262.91,3797.09 4272.28,3787.72 4272.28,3750 v1(4290,3732.28) ; J1.2@4440,3160 4510,3090 4570,3090 4596.54,3116.54 R5.2 ; J1.2 4450,3240
  Bottom Layer w8: v1(4290,3732.28) 4290,3690 3970,3370 3970,3320 4040,3250 4370,3250 J1.2
NetJ2_2: J2.2 U2.1 | length 685.3
  Top Layer w8: U2.1 2805.16,3224.84 2940,3090 3310,3090 J2.2
NetJ2_4: J2.4 U2.8 | length 647.4
  Top Layer w10: U2.8 2816.02,3403.98 2840,3380 3000,3380 3110,3270 3110,3220 3140,3190 3210,3190 J2.4
NetJ2_8: J2.8 U2.10 | length 548.9
  Top Layer w10: U2.10 2814.84,3455.16 v1(2840,3430) ; J2.8@3050,3140 J2.8
  Bottom Layer w8: v1(2840,3430) 2840,3260 2910,3190 3000,3190 3050,3140 J2.8
NetJ2_10: J2.10 U2.3 | length 272.4
  Top Layer w10: U2.3@2743.98,3276.02 2803.98,3276.02 2940,3140 J2.10
NetJP1_1: JP1.1 U6.18 | length 308
  Top Layer w10: U6.18 v1(4362.5,5367.5)
  Bottom Layer w8: v1(4362.5,5367.5) 4460,5270 JP1.1
NetJP1_3: JP1.3 U6.15 | length 299.7
  Top Layer w10: U6.15 4392.5,5292.5 4470,5370 JP1.3
NetR1_2: R1.2 U1.150 | length 2095.5
  Top Layer w10: U1.150 v1(3216.14,5266.14) ; v1(4440,5470) R1.2
  Bottom Layer w8: v1(3216.14,5266.14) 3260,5310 3260,5480 3440,5660 4320,5660 4440,5540 v1(4440,5470)
NetR2_2: R2.2 U1.152 | length 2299.8
  Top Layer w10: v1(3140,5110) 3176.77,5073.23 U1.152 ; v1(4540,5470) R2.2
  Bottom Layer w8: v1(3140,5110) 3140,5490 3330,5680 4340,5680 4540,5480 v1(4540,5470)
NetR3_2: R3.2 U1.154 | length 2609.8
  Top Layer w10: v1(3080,5090) 3137.4,5032.6 U1.154 ; v1(4640,5470) R3.2
  Bottom Layer w8: v1(3080,5090) 3080,5470 3390,5780 4460,5780 4640,5600 v1(4640,5470)
NetR7_2: R7.2 U1.160 | length 1645.5
  Top Layer w10: U1.160 3067.09,4682.91 3070,4680 v1(3070,4650) ; v1(3270,3550) 3340,3480 3420,3480 3466.54,3433.46 R7.2
  Bottom Layer w8: v1(3070,4650) 3020,4600 3020,4540 2980,4500 2980,3780 3080,3680 3100,3680 3230,3550 v1(3270,3550)
NetR8_1: R8.1 U1.159 | length 1793.2
  Top Layer w10: U1.159 3080,4702.6 3140,4642.6 3140,4570 3110,4540 v1(3080,4540) ; v1(3310,3580) 3380,3510 3520,3510 R8.1@3580,3450
  Bottom Layer w8: v1(3080,4540) 3070,4540 3010,4480 3010,3830 3080,3760 3090,3760 3130,3720 3130,3690 3240,3580 v1(3310,3580)
NetR9_1: R9.1 U2.17 | length 735
  Top Layer w10: U2.17@2510,3300 2590,3300 2640,3350 2640,3410 2740,3510 2870,3510 2973.46,3406.54 R9.1
NetR9_2: R9.2 U1.208 | length 364.9
  Top Layer w10: U1.208@2978.81,3738.81 2940,3700 2940,3570 3036.54,3473.46 R9.2
NetR12_1: R12.1 U1.107 | length 405.1
  Top Layer w8: U1.107 4062.6,4882.6 4080,4900 4326.54,4900 R12.1
NetR13_1: R13.1 U1.106 | length 369.8
  Top Layer w10: U1.106 4082.28,4787.72 4090,4780 4280,4780 4320,4740 R13.1
NetR14_1: R14.1 U1.101 | length 431.1
  Top Layer w10: U1.101 4517.09,4682.91 R14.1@4560,4640 ; 4530,4680 4546.54,4663.46 R14.1
NetR15_2: R15.2 U1.161 | length 316.5
  Top Layer w8: R15.2 2910,4896.54 2910,4710 2956.77,4663.23 U1.161
NetR16_1: R16.1 U1.100 | length 202.7
  Top Layer w10: U1.100 4316.77,4663.23 4340,4640 R16.1
NetR17_2: R17.2 U1.162 | length 383.7
  Top Layer w8: R17.2 2800,4870 2890,4780 2890,4700 2946.46,4643.54 U1.162
NetR18_1: R18.1 U1.62 | length 604.6
  Top Layer w10: U1.62 4394.8,3915.2 4640,3670 R18.1
NetR19_1: R19.1 U1.61 | length 508.2
  Top Layer w10: U1.61 4334.49,3895.51 4540,3690 R19.1
NetR20_1: R20.1 U1.204 | length 284.8
  Top Layer w8: R20.1 2810,3740 2886.77,3816.77 U1.204
NetR21_1: R21.1 U1.203 | length 238
  Top Layer w8: R21.1@2770,3840 2773.54,3836.46 U1.203
NetR22_1: R22.1 U1.52 | length 398.5
  Top Layer w10: U1.52@4101.19,3620 4170,3620 4220,3670 4410,3670 4440,3640 R22.1
NetR23_1: R23.1 U1.51 | length 364.3
  Top Layer w10: U1.51 4082.28,3577.72 4110,3550 4200,3550 4263.46,3613.46 R23.1
NetU1_57: U1.57 U3.118 | length 1014.8
  Top Layer w8: v1(4993.62,3703.62) U3.118
  Top Layer w10: U1.57 4293.23,3816.77 v1(4330,3780)
  Bottom Layer w8: v1(4330,3780) 4406.38,3703.62 v1(4993.62,3703.62)
NetU1_58: U1.58 U3.116 | length 1009.9
  Top Layer w8: v1(4964.88,3735.12) U3.116
  Top Layer w10: U1.58 v1(4343.54,3836.46)
  Bottom Layer w8: v1(4343.54,3836.46) 4444.88,3735.12 v1(4964.88,3735.12)
NetU1_63: U1.63 U3.117 | length 740.9
  Top Layer w8: U1.63 4465.12,3934.88 4696.38,3703.62 U3.117
NetU1_64: U1.64 U3.109 | length 701.3
  Top Layer w8: U1.64 4374.57,3954.57 v1(4380,3960) ; v1(4560,3960) 4690.39,3829.61 U3.109
  Bottom Layer w8: v1(4380,3960) v1(4560,3960)
NetU1_65: U1.65 U3.110 | length 1040.9
  Top Layer w8: U1.65 4284.25,3974.25 4300,3990 v1(4420,3990) ; v1(4970.39,3829.61) U3.110
  Bottom Layer w8: v1(4420,3990) 4760,3990 4920.39,3829.61 v1(4970.39,3829.61)
NetU1_67: U1.67 U3.111 | length 725
  Top Layer w8: U1.67 4456.38,4013.62 4670,3800 U3.111@4830,3800
NetU1_68: U1.68 U3.112 | length 1065.3
  Top Layer w8: U1.68 4526.69,4033.31 v1(4650,3910) ; v1(4991.89,3798.11) U3.112
  Bottom Layer w8: v1(4650,3910) 4761.89,3798.11 v1(4991.89,3798.11)
NetU1_76: U1.76 U3.16 | length 1822.2
  Top Layer w8: U1.76@4190,4190 U1.76@4193.5,4190
  Top Layer w11: U1.76 4299.21,4190.79 v1(4310,4180) ; v1(5000,5240) 5000,5410 5049.53,5459.53 U3.16
  Bottom Layer w11: v1(4310,4180) 4310,4550 v1(5000,5240)
NetU1_114: U1.114 U3.43 | length 1038.1
  Top Layer w8: U1.114 3924.8,4914.8 4028.58,5018.58 U3.43
NetU1_115: U1.115 U3.33 | length 1129
  Top Layer w8: U1.115 3905.12,4925.12 4020,5040 4650,5040 4786.06,5176.06 U3.33
NetU1_116: U1.116 U3.31 | length 1173.7
  Top Layer w8: U1.116 3885.43,4945.43 4010,5070 4640,5070 4777.56,5207.56 U3.31
NetU1_117: U1.117 U3.23 | length 1257.4
  Top Layer w8: U1.117 3865.75,4965.75 4000,5100 4560,5100 4793.54,5333.54 U3.23
NetU1_119: U1.119 U3.15 | length 1387.8
  Top Layer w8: U1.119 3826.38,4966.38 3990,5130 4540,5130 4770,5360 4770,5440 4790,5460 U3.15@4830,5460
NetU1_120: U1.120 U3.14 | length 1716.8
  Top Layer w8: U1.120 3806.69,4986.69 3980,5160 4520,5160 v1(4740,5380) ; v1(5021.02,5491.02) U3.14
  Bottom Layer w8: v1(4740,5380) 4910,5380 v1(5021.02,5491.02)
NetU1_126: U1.126 U6.7 | length 731.4
  Top Layer w10: U1.126 v1(3688.58,4948.58) ; v1(3890,5310) 3947.5,5367.5 U6.7
  Bottom Layer w8: v1(3688.58,4948.58) 3890,5150 v1(3890,5310)
NetU1_128: U1.128 U6.10 | length 669.8
  Top Layer w10: U1.128 3649.21,4989.21 3952.5,5292.5 U6.10
NetU6_16: U6.16
SYSCLK: CONN1.60 U1.181 | length 1029.4
  Top Layer w8: v1(2790,4290) 2810.47,4269.53 U1.181
  Top Layer w10: U1.181@3000,4270 U1.181@3006.5,4270
  Bottom Layer w8: CONN1.60 2445,4925 2790,4580 v1(2790,4290)
TCK: H1.6 R8.2 U2.6 | length 1644.4
  Top Layer w8: U2.6 2787.2,3352.8 v1(2810,3330)
  Top Layer w10: v1(3530,3330) 3566.54,3366.54 R8.2 3580,3320 3610,3290 3830,3290 3897.48,3222.52 H1.6
  Bottom Layer w8: v1(2810,3330) 2810,3210 2930,3090 3380,3090 3420,3130 3420,3290 3460,3330 v1(3530,3330)
TDI: H1.10 U2.4 | length 1693.1
  Top Layer w8: U2.4 2701.61,3301.61 2680,3280 2680,3200 2810,3070 3450,3070 v1(3470,3090)
  Bottom Layer w8: v1(3470,3090) 3500,3090 3670,3260 3993.7,3260 H1.10
TDO: H1.8 R6.1 U1.158 | length 2332.6
  Top Layer w10: v1(2952.28,4722.28) U1.158 ; R6.1@3686.54,3360 3830,3360 3976.22,3213.78 H1.8
  Bottom Layer w8: v1(2952.28,4722.28) 2950,4720 2950,3770 3210,3510 3240,3510 3380,3370 3630,3370 3640,3360 v1(3740,3360)
TMS: H1.4 R7.1 U2.5 | length 1670.5
  Top Layer w8: v1(2680,3330) 2682.8,3327.2 U2.5
  Top Layer w10: R7.1 v1(3480,3300) 3520,3260 3790,3260 3818.74,3231.26 H1.4
  Bottom Layer w8: v1(2680,3330) 2680,3260 2870,3070 3400,3070 3480,3150 v1(3480,3300)
VCC: C7.2 C25.2 C26.2 C27.2 C28.2 C29.2 C30.2 C31.2 C32.2 C33.2 C34.2 C35.2 C36.2 C37.1 C39.2 CONN1.11 CONN1.12 CONN1.67 CONN1.68 H1.2 R4.2 R5.1 R6.2 R11.2 R13.2 R16.2 R17.1 R19.2 R21.2 R22.2 U1.6 U1.23 U1.32 U1.49 U1.60 U1.73 U1.84 U1.98 U1.110 U1.127 U1.136 U1.153 U1.164 U1.177 U1.188 U1.201 U2.18 U2.19 U2.20 U3.35 U3.36 U3.89 U3.90 U4.1 U4.5 U5.1 U5.5 U6.3 | length 3434.8
  Top Layer w8: v1(2686.54,3806.54) R21.2 ; R17.1 v1(2800,5020) ; U1.136 v1(3491.73,4888.27) ; R11.2 3566.54,3200 H1.2@3750,3200 ; R6.2 v1(3713.46,3433.46) ; v1(4141.73,4131.73) U1.73 ; R13.2@4450,4730 4450,4740 v1(4490,4780) ; U3.89 4885.43,4144.57 4910,4120 v1(4910,4100) ; U3.90 v1(5224.57,4144.57)
  Top Layer w10: v1@2460.43,3250.43 U2.19 ; U2.20 2485.16,3224.84 v1(2460,3250) 2460,3270 2466.02,3276.02 U2.18 ; v1(2680,3560) R4.2 ; U1.201 v1@3064.17,3875.83 ; U1.188 3061.73,4131.73 v1(3070,4140) ; U1.177 3061.73,4348.27 v1(3080,4330) ; U1.164 3055.83,4604.17 v1(3080,4580) ; v1(3140,4760) 3157.09,4777.09 U1.153 ; U1.6 v1(3196.46,3703.54) ; U1.23 v1(3531.1,3701.1) ; v1(3668.9,4771.1) U1.127 ; U1.32 v1(3708.27,3701.73) ; v1(3860,5380) C37.1 3869.06,5450 3955.02,5450 3972.52,5467.5 v1(4107.5,5467.5) ; v1(4003.54,4776.46) U1.110 ; v1(4026.54,3723.46) 4042.91,3707.09 U1.49 ; v1(4128.27,4348.27) U1.84 ; v1(4135.83,3875.83) U1.60 ; v1(4136.14,4623.86) U1.98 ; v1(4430,3500) R22.2@4430,3550 ; R16.2 v1(4500,4640) ; v1(4540,3500) R19.2 ; R5.1 v1(4763.46,3183.46)
  Top Layer w12: v1(4760,5100) 4760,5120 4784.57,5144.57 U3.35 ; U3.36 v1(5235.43,5144.57)
  Top Layer w20: v1(2660,5240) U5.1 ; U5.5 v1(2940,5240) ; v1(3320,5190) U4.1 ; v1(3520,5190) U4.5
  Bottom Layer w8: v1@3064.17,3875.83 3068.35,3880 C27.2@3106.54,3880 ; v1(3080,4330) 3080,4326.54 C25.2 ; C39.2 4106.54,5466.54 v1(4107.5,5467.5) ; v1(4763.46,3183.46) v1@4770,3190
  Bottom Layer w10: v1(3070,4140) 3070,4143.46 C26.2 ; v1(3140,4760) 3153.46,4760 C7.2 ; C28.2@3190,3750 3190,3710 v1(3196.46,3703.54) ; v1(3531.1,3701.1) 3540,3710 C29.2 ; v1(3668.9,4771.1) 3680,4760 C36.2 ; C30.2 3700,3710 v1(3708.27,3701.73) ; v1(4003.54,4776.46) 4013.46,4766.54 C35.2 ; v1(4026.54,3723.46) C31.2 ; C33.2 4100,4320 v1(4128.27,4348.27) ; C34.2 4120,4640 v1(4136.14,4623.86) ; C32.2@4100,3870 4130,3870 v1(4135.83,3875.83)
  other v1: 3070,3880
pads on no net: CONN1.0 CONN1.34 CONN1.37 CONN1.38 CONN1.39 CONN1.40 CONN1.41 CONN1.43 CONN1.44 CONN1.45 CONN1.47 CONN1.48 CONN1.49 CONN1.51 CONN1.52 CONN1.53 CONN1.55 CONN1.56 CONN1.57 CONN1.58 H1.12 H1.14 U1.2 U1.3 U1.4 U1.5 U1.7 U1.9 U1.10 U1.11 U1.12 U1.13 U1.15 U1.16 U1.18 U1.19 U1.20 U1.21 U1.22 U1.24 U1.26 U1.27 U1.28 U1.29 U1.31 U1.33 U1.34 U1.35 U1.50 U1.97 U1.102 U1.122 U1.123 U1.124 U1.125 U1.130 U1.131 U1.132 U1.133 U1.135 U1.137 U1.138 U1.139 U1.140 U1.141 U1.143 U1.144 U1.146 U1.147 U1.148 U1.149 U1.155 U1.156 U1.206 U2.2 U2.9 U2.12 U2.13 U2.14 U2.15 U2.16 U3.0 U3.1 U3.2 U3.3 U3.4 U3.5 U3.6 U3.7 U3.8 U3.9 U3.10 U3.11 U3.12 U3.13 U3.19 U3.20 U3.21 U3.22 U3.24 U3.25 U3.26 U3.27 U3.28 U3.29 U3.30 U3.32 U3.34 U3.37 U3.38 U3.39 U3.40 U3.41 U3.42 U3.44 U3.45 U3.46 U3.47 U3.48 U3.49 U3.50 U3.51 U3.52 U3.55 U3.56 U3.57 U3.58 U3.59 U3.60 U3.61 U3.62 U3.67 U3.68 U3.69 U3.70 U3.71 U3.72 U3.73 U3.74 U3.75 U3.76 U3.77 U3.79 U3.80 U3.81 U3.82 U3.83 U3.84 U3.85 U3.86 U3.87 U3.88 U3.114 U3.115 U3.119 U3.120 U3.121 U3.122 U3.123 U3.124 U3.125 U3.126 U3.127 U3.128 U3.129 U3.130 U3.131 U3.132 U3.133 U3.134 U4.4 U6.8 U6.9 U6.11 U6.12 U6.13 U6.14 U6.17 U6.19

## Polygon pours and split planes (outlines as drawn)
+1.2VCC on Top Layer (hatched 90Degree grid 8 track 8, remove dead copper): 2887.56,5191.78 2830,5260 4200,5260 4200,3650 2830,3650 2830,5260
GND on Top Layer (hatched 90Degree grid 8 track 8, remove dead copper): 3790,5930 2510,5930 2510,5310 3810,5310 3810,5930
+2.5VCC on Bottom Layer (hatched 90Degree grid 8 track 8, remove dead copper): 3000,5330 3000,3630 4220,3630 4220,5330
GND on Internal Plane 1 (split plane): 2020.02,3020.01 5979.98,3020.01 5979.98,5979.98 2020.02,5979.98
VCC on Internal Plane 2 (split plane): 2020.02,3020.01 5979.98,3020.01 5979.98,5979.98 2020.02,5979.98

## Keep-outs
Keep-Out Layer:
  lines w10: 2050,3050 5950,3050 5950,5950 2050,5950 2050,3050

## Other copper
Top Layer:
  text "Layer 1" at 6220,4020 h90
Bottom Layer:
  text "Layer 4" at 6210,3580 h90
Internal Plane 1 (plane layer: these items are gaps in the copper):
  text "Layer 2" at 6200,3880 h90
Internal Plane 2 (plane layer: these items are gaps in the copper):
  text "Layer 3" at 6210,3720 h90

## Silkscreen, mask and mechanical layers (free items; w line width, h text height)
Top Overlay:
  rectangle: 3715,5695 3735,5795
  region: 3744.58,5745.17 3764.57,5744.83 3765.42,5794.83 3745.43,5795.17
  rectangle: 3775,5695 3795,5795
  rectangle: 3835,5775 3885,5795
  rectangle: 3805,5695 3825,5765
  rectangle: 3805,5775 3825,5795
  rectangle: 3835,5695 3855,5765
  text "SOMA Neural Event Processor" at 2340,5830 h60
  text "Copyright Eric Jonas" at 2335,5745 h45
  text "2004" at 3495,5735 h50
  text "Version 1.1" at 2335,5685 h30
  text "jonas@soma.mit.edu" at 3160,5680 h30
  text "RX" at 4570,5360 h30
  text "GND" at 4570,5300 h30
  text "Serial" at 4450,5240 h40 r90
  text "TX" at 4570,5240 h30
  text "Triton-ECO 144-pin DIMM" at 5650,3810 h60 r90
cutout:
  the board outline again, w1
Drill Drawing:
  text ".LEGEND" at 6200,3200 h60
  text "Drill Drawing." at 6200,3100 h60

## Dimensions
2050,3050 to 5950,3050 on Mechanical 1
2050,3050 to 2050,5950 on Mechanical 1

## Text inside footprints (layer, text, board x,y; h text height)
CONN1: Bottom Overlay "MOLEX 15922068 VERT PLUG" at 2085.83,3466.34 h30 r270
J2: Top Overlay "2" at 3460,3160 h50 r180; Top Overlay "1" at 3440,3260 h50 r180; Top Overlay "9" at 2900,3260 h50 r180; Top Overlay "10" at 2900,3160 h50 r180